# Altium PCB module_wifi.PcbDoc
Units mm, origin at the board's own origin, x right, y up, seen from the top; angles counter-clockwise.
Board outline 75.03 x 38 mm, 2 copper layers (Top Layer, Bottom Layer); 59 components, 41 nets, 252 pads, 57 vias.
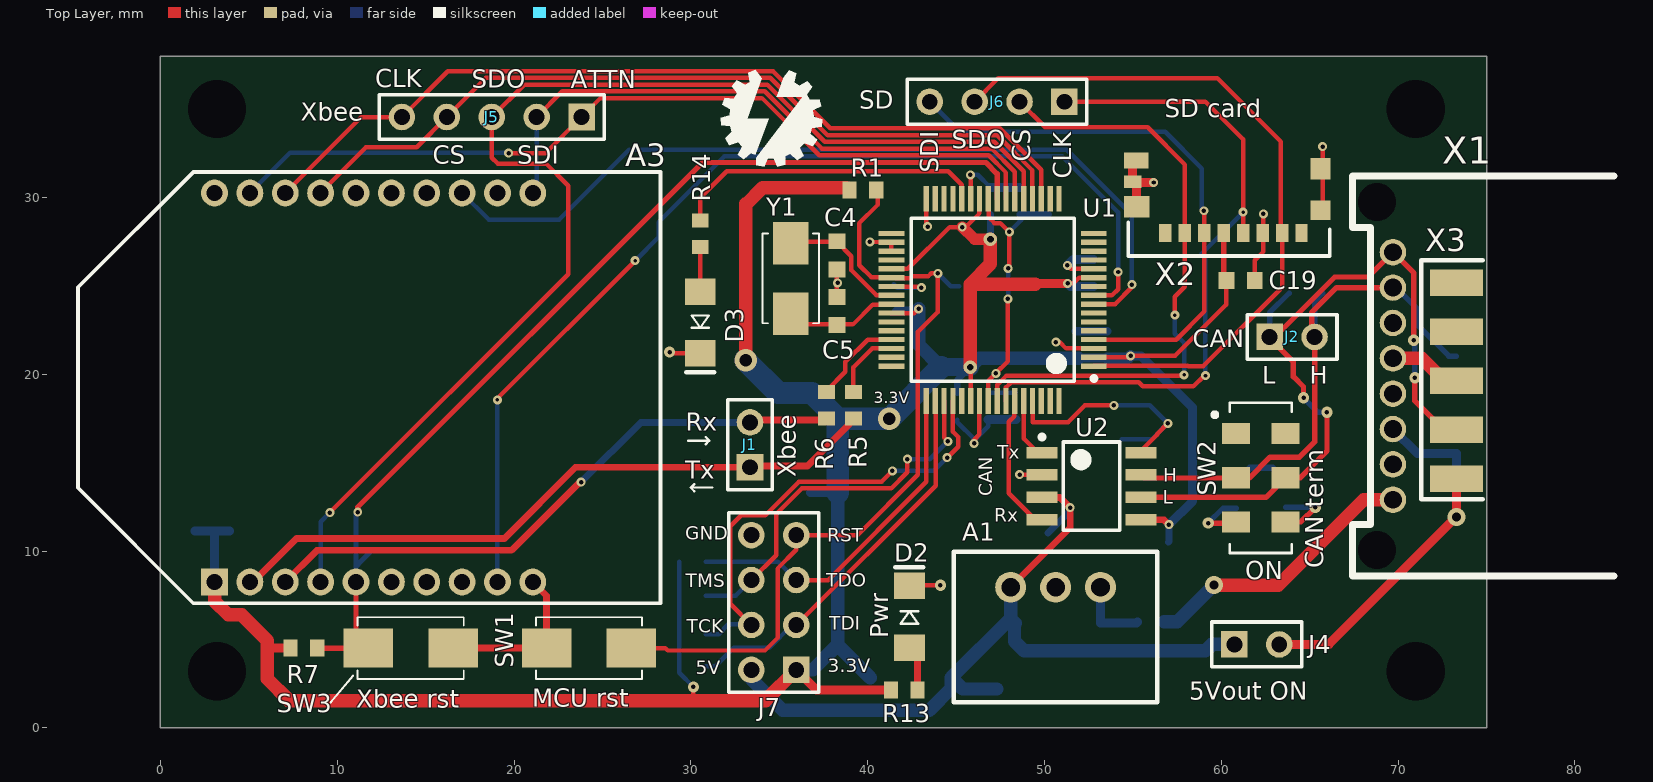
[diagram p0: Top Layer view]
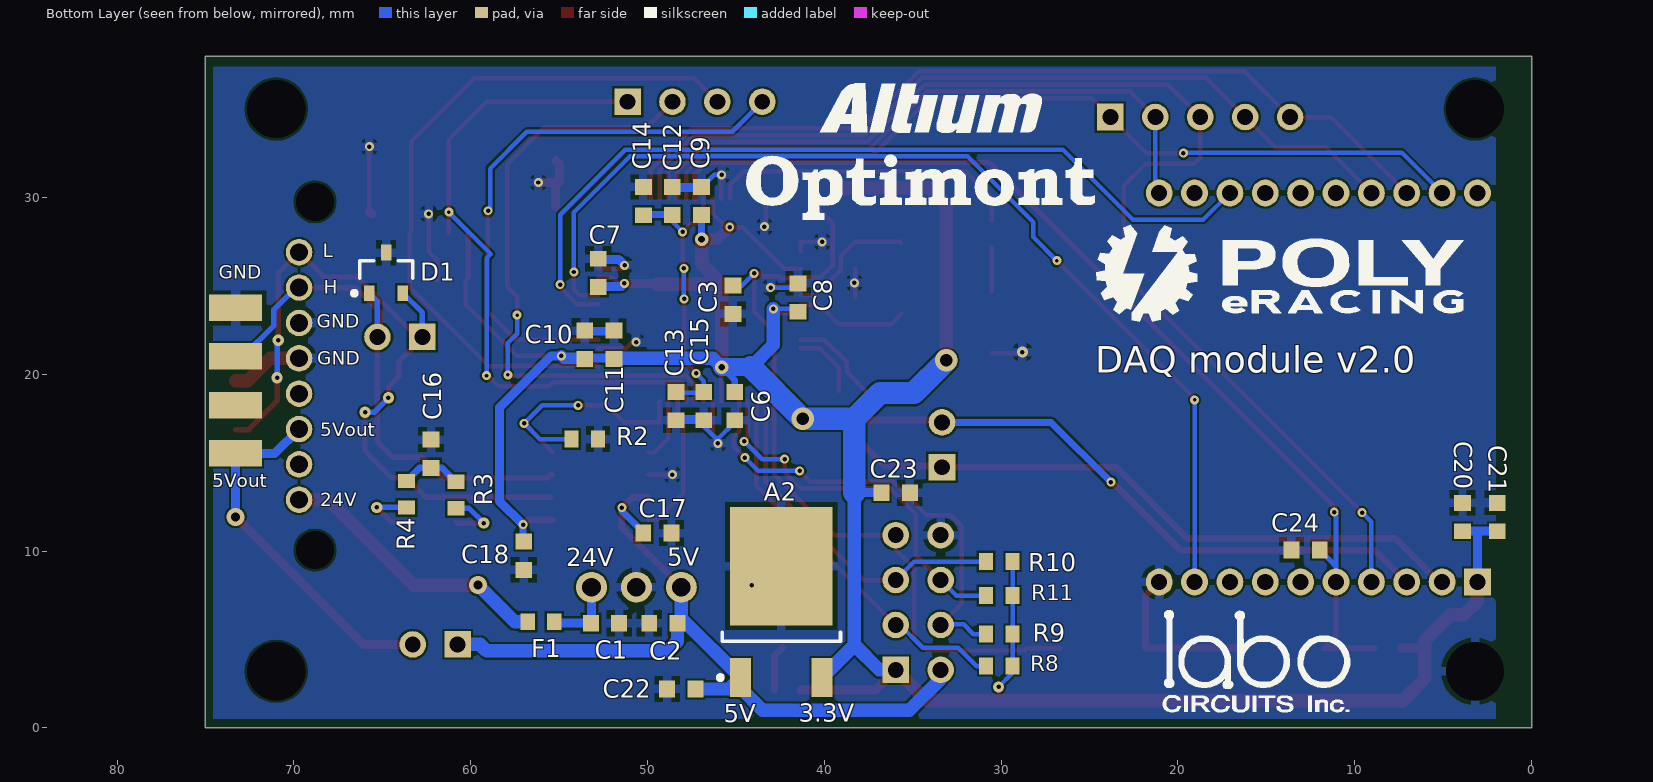
[diagram p1: Bottom Layer view, seen from below]
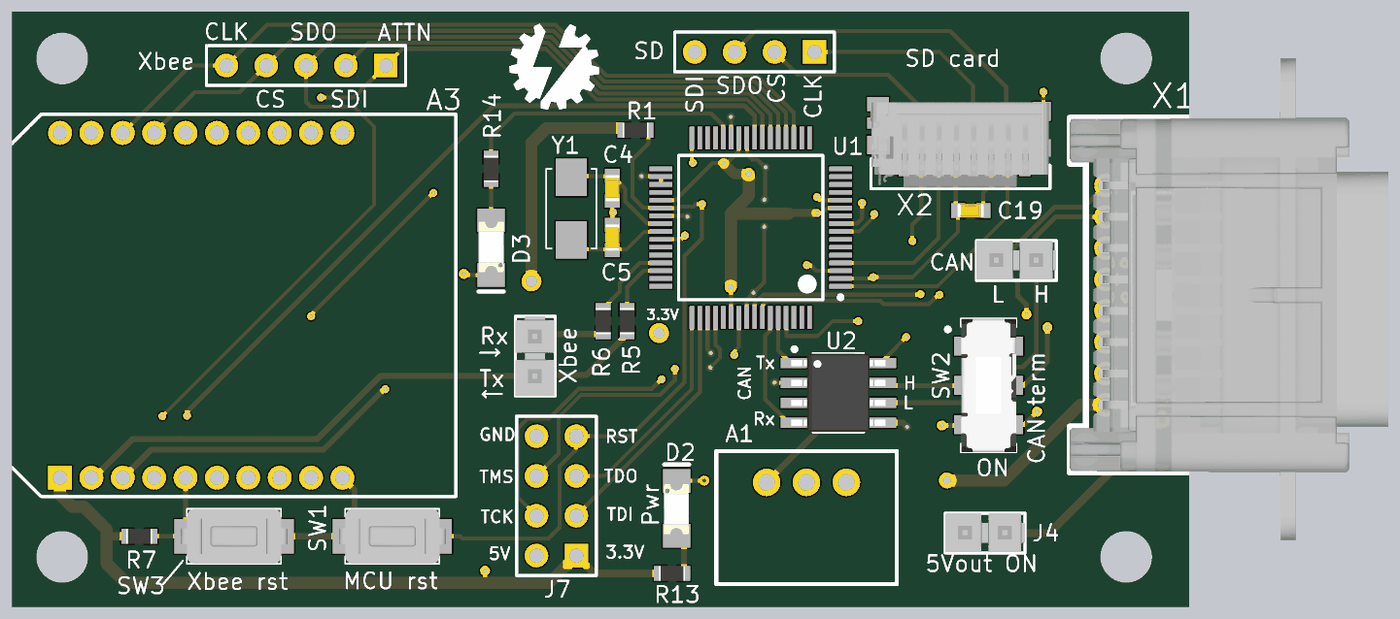
[diagram p2: 3D render of the assembled board from above, using the file's embedded part models]
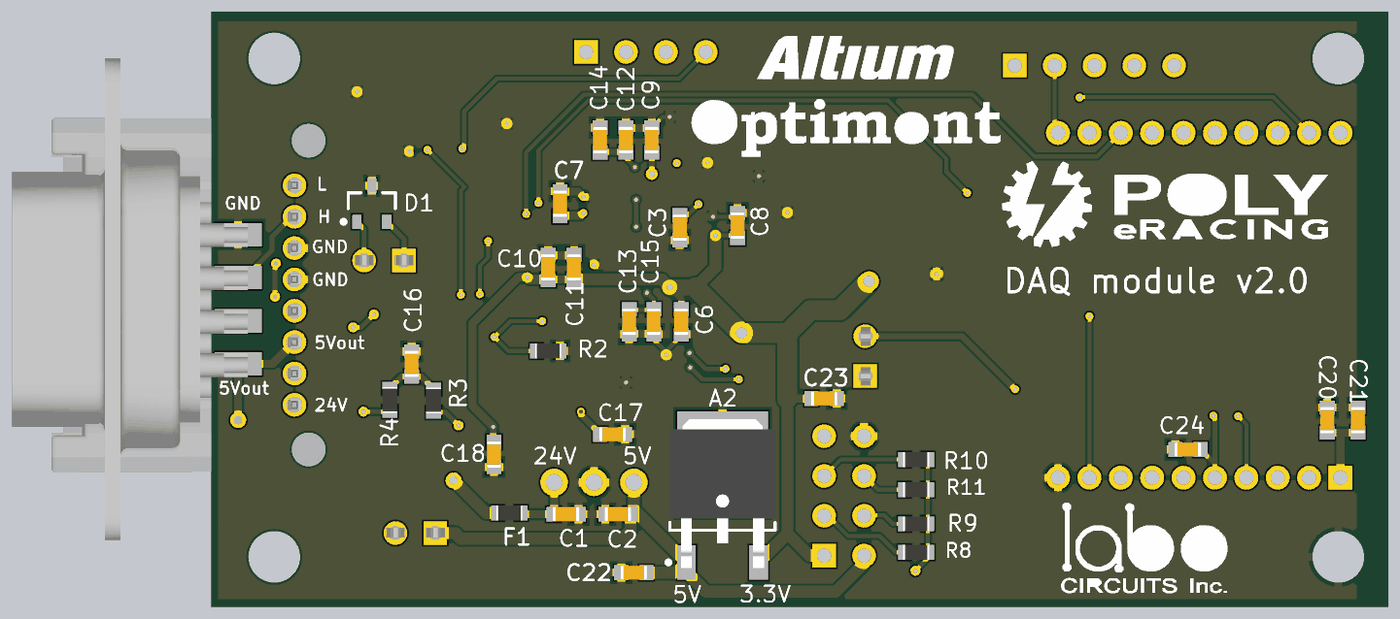
[diagram p3: 3D render of the assembled board from below, using the file's embedded part models]

## Layer stack, top to bottom
Top Solder: solder mask 0.0102, Solder Resist, Dk 3.5
Top Layer: signal copper 0.0356
Dielectric 1: dielectric 0.32, FR-4, Dk 4.8
Bottom Layer: signal copper 0.0356
Bottom Solder: solder mask 0.0102, Solder Resist, Dk 3.5

## Board outline
0,0 75.025,0 75.025,38 0,38

## Design rules (kind name [scope] priority, off if disabled: settings)
Clearance [All] p1: gap=0.127
HoleSize [All] p1: absolutevalues=TRUE maxlimit=5.08 minlimit=0.203 maxpercent=80.000 minpercent=20.000
MinimumSolderMaskSliver [All] p1: minsoldermaskwidth=0.127
NetAntennae [All] p1: netantennaetolerance=0.254
PlaneConnect [All] p1: planeconnectstyle=Relief reliefexpansion=0.508 reliefentries=4 reliefconductorwidth=0.254 reliefairgap=0.381
PolygonConnect PolygonConnect_GND [InNet('GND') vs InNet('GND')] p1: connectstyle=Relief reliefconductorwidth=0.508 reliefentries=4 polygonreliefangle="90 Angle" airgapwidth=0.254
PolygonConnect [All] p2: connectstyle=Relief reliefconductorwidth=0.254 reliefentries=4 polygonreliefangle="90 Angle" airgapwidth=0.254
RoutingVias [All] p1: holewidth=0.381 width=0.762 viastyle="Through Hole" minholewidth=0.203 minwidth=0.406 maxholewidth=3.048 maxwidth=2.54
SilkToSilkClearance [All] p1: silktosilkclearance=0
SilkToSolderMaskClearance [IsPad] p1: minsilkscreentomaskgap=0 clearancetoexposedcopper=TRUE
SolderMaskExpansion [All] p1: expansion=0.102
Width [All] p1: maxlimit=2.54 minlimit=0.203 preferedwidth=0.381
24 further rules are at their usual default settings.

## Components (designator, comment, footprint, x,y, rotation, side; value= is the part's Value field where it differs from the comment)
A1 "5V DCDC" R-78E-0.5 53.169,7.955 r180 top
A2 "3.3V LDO" TO252-3 42.437,5.996 r90 bottom
A3 "XBEE WI-FI S6B" Xbee_TH 3.061,8.252 r90 top
C1 "CAP CER 0603 1uF 25V X7R 20%" C0603 52.407,5.923 r0 bottom
C2 "CAP CER 0603 1uF 25V X7R 20%" C0603 49.105,5.923 r180 bottom
C3 "CAP CER 0603 0.1uF 50V C0G 10%" C0603 45.168,24.211 r90 bottom
C4 "CAP CER 0603 10pF 50V C0G 5%" C0603 38.261,26.724 r90 top
C5 "CAP CER 0603 10pF 50V C0G 5%" C0603 38.261,23.579 r270 top
C6 "CAP CER 0603 0.1uF 50V C0G 10%" C0603 45.069,18.2 r90 bottom
C7 "CAP CER 0603 0.1uF 50V C0G 10%" C0603 52.788,25.735 r270 bottom
C8 "CAP CER 0603 0.1uF 50V C0G 10%" C0603 41.485,24.338 r270 bottom
C9 "CAP CER 0603 0.1uF 50V C0G 10%" C0603 46.946,29.799 r270 bottom
C10 "CAP CER 0603 0.01uF 50V X7R 10%" C0603 53.55,21.671 r270 bottom
C11 "CAP CER 0603 1uF 25V X7R 20%" C0603 51.899,21.671 r270 bottom
C12 "CAP CER 0603 0.1uF 50V C0G 10%" C0603 48.597,29.799 r270 bottom
C13 "CAP CER 0603 0.1uF 50V C0G 10%" C0603 48.386,18.2 r90 bottom
C14 "CAP CER 0603 2.2uF 6.3V X7R 10%" C0603 50.235,29.793 r270 bottom
C15 "CAP CER 0603 1uF 25V X7R 20%" C0603 46.819,18.2 r90 bottom
C16 "CAP CER 0603 47nF 50V X7R 10%" C0603 62.244,15.51 r90 bottom
C17 "CAP CER 0603 2.2uF 6.3V X7R 10%" C0603 49.444,11.021 r0 bottom
C18 "CAP CER 0603 0.1uF 50V C0G 10%" C0603 57.001,9.734 r90 bottom
C19 "CAP CER 0603 0.1uF 50V C0G 10%" C0603 61.093,25.297 r180 top
C20 "CAP CER 0603 1uF 25V X7R 20%" C0603 3.907,11.924 r270 bottom
C21 "CAP CER 0603 8.2pF 50V COG ±0.5pF" C0603 1.944,11.924 r270 bottom
C22 "CAP CER 0603 10uF 6.3V X5R 20%" C0603 48.09,2.2 r180 bottom
C23 "CAP CER 0603 4.7uF 25V X7R 10%" C0603 35.96,13.301 r0 bottom
C24 "CAP CER 0603 0.1uF 50V C0G 10%" C0603 12.781,10.056 r180 bottom
D1 "PESD1CAN-UX" SOT23 64.786,25.734 r90 bottom
D2 "Green LED" LED1206 42.355,6.295 r270 top
D3 "Green" LED1206 30.532,22.927 r90 top
F1 "500 mA" R0603 56.024,6.002 r0 bottom
J1 "Header for debugging" HDR1X2 33.346,14.739 r90 top
J2 "Header for CAN" HDR1X2 62.737,22.109 r0 top
J4 "Header 2" HDR1X2 60.741,4.72 r0 top
J5 "Header, Xbee SPI" HDR1X5 23.819,34.551 r180 top
J6 "SD SPI" HDR1X4 51.13,35.416 r180 top
J7 "JTAG" JTAG_Header 35.962,3.281 r90 top
R1 "RES 0603 10k 5% 0.1W" R0603 39.732,30.431 r180 top
R2 "RES 0603 10k 5% 0.1W" R0603 53.55,16.337 r0 bottom
R3 "RES 0603 60R 1% 1/4W" R0603 60.841,13.172 r270 bottom
R4 "RES 0603 60R 1% 1/4W" R0603 63.631,13.22 r270 bottom
R5 "RES 0603 100R 5% 1/4W" R0603 39.199,18.242 r90 top
R6 "RES 0603 100R 5% 1/4W" R0603 37.675,18.242 r90 top
R7 "RES 0603 4.7k 5% 0.1W" R0603 8.116,4.513 r180 top
R8 "RES 0603 100k 5% 0.1W" R0603 30.099,3.493 r180 bottom
R9 "RES 0603 100k 5% 0.1W" R0603 30.099,5.305 r180 bottom
R10 "RES 0603 100k 5% 0.1W" R0603 30.099,9.409 r180 bottom
R11 "RES 0603 100k 5% 0.1W" R0603 30.099,7.486 r180 bottom
R13 "RES 0603 220R 5% 0.25W" R0603 42.067,2.148 r180 top
R14 "RES 0603 220R 5% 1/4W" R0603 30.529,27.957 r90 top
SW1 "147873-1" 147873 24.239,4.513 r0 top
SW2 "CL-SB-22A-01T" CL-SB-22A-01T 62.237,14.144 r0 top
SW3 "147873-1" 147873 14.15,4.513 r180 top
U1 "Microconroller" LQFP64 47.073,24.211 r180 top
U2 "CAN Transceiver" SOIC-8 52.661,13.67 r0 top
X1 "34793-0080" 34791-0080 69.711,19.903 r90 top
X2 "475710001" 475710001 64.541,27.989 r180 top
X3 "D-SUB Connector" "A-DS 09 LL/Z" 73.301,19.639 r270 top
Y1 "NX5043GA-16.00MHz" NX5032GA 35.645,25.42 r270 top

## Footprints (in the part's own frame and the unit in brackets; to place one, negate y for a bottom-side part, rotate by r counter-clockwise, add the part's x,y. Pads: shape width x height; smd on the part's side, far side on the other; paste and mask are expansions set on the pad)
34791-0080 [mm] "Molex Mini50, 8 position, single row"
  round 0 hole 2.15 unplated paste+0 mask+0: 0(-9.85,0.9) 0(9.85,0.9)
  round 1.5 hole 1: 1(-7,0) 2(-5,0) 3(-3,0) 4(-1,0) 5(1,0) 6(3,0) 7(5,0) 8(7,0)
  silkscreen extent -11.31,-12.5 11.31,2.3, body extent -11.31,-15.5 11.31,2.3, height 10.09
147873 [mm]
  rect 2.8x2.2 smd: 1(-2.4,0) 2(2.4,0)
  silkscreen extent -3,-1.75 3,1.75, body extent -3.4,-1.75 3.4,1.75, height 5.15
475710001 [mm] "9 (8 + 1) Position Card Connector Secure Digital - microSD™ Surface Mount, Right Angle Gold"
  rect 1.15x1.1 smd mask+0.05: 0(-1.075,-1.3)
  rect 1.15x1.2 smd mask+0.1: 0(-1.075,-3.64)
  rect 1.45x1.2 smd mask+0.1: 0(9.325,-1.49)
  rect 1.4x0.9 smd mask+0.1: 0(9.35,-4.1)
  rect 1x0.7 smd mask+0.1: 0(9.55,-2.89)
  rect 0.7x1 smd mask+0.1: 1(7.7,0) 2(6.6,0) 3(5.5,0) 4(4.4,0) 5(3.3,0) 6(2.2,0) 7(1.1,0) 8(0,0)
  silkscreen extent -1.6,-0.6 9.8,1.3, body extent -1.58,-15.3 9.82,1.25, height 2.31
"A-DS 09 LL/Z" [mm] "DSub, 9 pin, board edge"
  rect 1.5x3 smd: 1(5.54,0) 2(2.77,0) 3(0,0) 4(-2.77,0) 5(-5.54,0)
  rect 1.5x3 smd far side: 6(-4.115,0) 7(-1.385,0) 8(1.385,0) 9(4.115,0)
  silkscreen extent -6.8,-2 6.7,1.5, body extent -15.37,-0.62 15.37,14.39, height 5.77
C0603 [mm] "0603 Chip Capacitor, 2-Leads, Body 1,60x0,80mm, IPC Medium Density"
  rect 0.9x0.95 smd: 1(-0.8,0) 2(0.8,0)
  body extent -0.85,-0.45 0.85,0.45, height 0.9
CL-SB-22A-01T [mm] "CL-SB-22A-01T Slide Switch, Flat, 6-Leads, Pitch 2,50mm,  Body 8,50x3,50mm,  IPC Medium Density"
  rect 1.6x1.2 smd: 1(-1.4,2.5) 2(-1.4,0) 3(-1.4,-2.5) 4(1.4,2.5) 5(1.4,0) 6(1.4,-2.5)
  silkscreen extent -2.73,-4.25 1.75,4.25, body extent -1.75,-4.25 1.75,4.25, height 5.5
HDR1X2 [mm] "Connector; Header; 2 Position"
  rect 1.5x1.5 hole 0.9: 1(0,0)
  round 1.5 hole 0.9: 2(2.54,0)
  silkscreen extent -1.27,-1.27 3.81,1.27, body extent -1.27,-1.22 3.81,1.27, height 8.44
HDR1X4 [mm] "Connector; Header; 4 Position"
  rect 1.5x1.5 hole 0.9: 1(0,0)
  round 1.5 hole 0.9: 2(2.54,0) 3(5.08,0) 4(7.62,0)
  silkscreen extent -1.27,-1.27 8.89,1.27
HDR1X5 [mm] "Connector; Header; 5 Position"
  rect 1.5x1.5 hole 0.9: 1(0,0)
  round 1.5 hole 0.9: 2(2.54,0) 3(5.08,0) 4(7.62,0) 5(10.16,0)
  silkscreen extent -1.27,-1.27 11.43,1.27
JTAG_Header [mm] "Programming header"
  rect 1.5x1.5 hole 0.9: 1(0,0)
  round 1.5 hole 0.9: 2(0,2.54) 3(2.54,0) 4(2.54,2.54) 5(5.08,0) 6(5.08,2.54) 7(7.62,0) 8(7.62,2.54)
  silkscreen extent -1.27,-1.27 8.89,3.81
LED1206 [mm] "LED 1206"
  rect 1.5x1.75 smd: 1(1.75,0) 2(-1.75,0)
  silkscreen extent -2.8,-0.8 0.4,0.8, body extent -1.55,-0.81 1.65,0.79, height 1.1
LQFP64 [mm] "TSQFP, 64-Leads, Body 10,00x10,00mm, Pitch 0,50mm, IPC Medium Density"
  rect 1.45x0.3 smd: 1(-5.725,3.75) 2(-5.725,3.25) 3(-5.725,2.75) 4(-5.725,2.25) 5(-5.725,1.75) 6(-5.725,1.25) 7(-5.725,0.75) 8(-5.725,0.25) 9(-5.725,-0.25) 10(-5.725,-0.75) 11(-5.725,-1.25) 12(-5.725,-1.75) 13(-5.725,-2.25) 14(-5.725,-2.75) 15(-5.725,-3.25) 16(-5.725,-3.75) 33(5.725,-3.75) 34(5.725,-3.25) 35(5.725,-2.75) 36(5.725,-2.25) 37(5.725,-1.75) 38(5.725,-1.25) 39(5.725,-0.75) 40(5.725,-0.25) 41(5.725,0.25) 42(5.725,0.75) 43(5.725,1.25) 44(5.725,1.75) 45(5.725,2.25) 46(5.725,2.75) 47(5.725,3.25) 48(5.725,3.75)
  rect 0.3x1.45 smd: 17(-3.75,-5.725) 18(-3.25,-5.725) 19(-2.75,-5.725) 20(-2.25,-5.725) 21(-1.75,-5.725) 22(-1.25,-5.725) 23(-0.75,-5.725) 24(-0.25,-5.725) 25(0.25,-5.725) 26(0.75,-5.725) 27(1.25,-5.725) 28(1.75,-5.725) 29(2.25,-5.725) 30(2.75,-5.725) 31(3.25,-5.725) 32(3.75,-5.725) 49(3.75,5.725) 50(3.25,5.725) 51(2.75,5.725) 52(2.25,5.725) 53(1.75,5.725) 54(1.25,5.725) 55(0.75,5.725) 56(0.25,5.725) 57(-0.25,5.725) 58(-0.75,5.725) 59(-1.25,5.725) 60(-1.75,5.725) 61(-2.25,5.725) 62(-2.75,5.725) 63(-3.25,5.725) 64(-3.75,5.725)
  silkscreen extent -5.85,-4.6 4.6,4.6, body extent -5,-5 5,5, height 1.45
NX5032GA [mm]
  rect 2.4x2 smd: 1(-2,0) 2(2,0)
  silkscreen extent -2.54,-1.6 2.54,1.6, body extent -2.54,-1.6 2.54,1.6, height 1.3
R0603 [mm] "R0603 Chip Resistor, 2-Leads, Body 1,57x0,85mm, IPC Medium Density"
  rect 0.8x0.95 smd: 1(-0.75,0) 2(0.75,0)
  body extent -0.82,-0.48 0.82,0.48, height 0.5
R-78E-0.5 [mm] "Through hole DCDC"
  round 1.75 hole 1.05: 1(0,0) 2(2.54,0) 3(5.08,0)
  silkscreen extent -3.21,-2 8.29,6.5, body extent -3.2,-2 8.3,6.5, height 10.4
SOIC-8 [mm] "SOIC, 8-Leads, Body 4.90x3.90mm, Pitch 1.27mm, IPC Medium Density"
  rect 1.75x0.65 smd: 1(-2.8,1.905) 2(-2.8,0.635) 3(-2.8,-0.635) 4(-2.8,-1.905) 5(2.8,-1.905) 6(2.8,-0.635) 7(2.8,0.635) 8(2.8,1.905)
  silkscreen extent -2.92,-2.5 1.6,2.9, body extent -3,-2.5 3,2.5, height 1.75
SOT23 [mm] "SOT23, 3-Leads, Body 2.90x2.30mm, Pitch 0.95mm, IPC Medium Density"
  rect 0.9x0.6 smd: 1(-1.15,0.95) 2(-1.15,-0.95) 3(1.15,0)
  silkscreen extent -1.27,-1.5 0.7,1.93, body extent -0.7,-1.5 0.7,1.5, height 1.1
TO252-3 [mm] "TO252-3, 3-Pads, Body 5,95x6,71mm (max), IPC Medium Density"
  rect 2.2x1.2 smd: 1(-3.15,2.3) 3(-3.15,-2.3)
  rect 6.7x5.8 smd: 2(3.15,0)
  silkscreen extent -3.27,-3.35 -0.6,3.58, body extent -3.5,-3.35 6,3.35, height 2.5
Xbee_TH [mm] "Xbee module, through whole"
  rect 1.52x1.52 / inner rect 2.5x1.2 / far side rect 1.52x1.52 hole 0.91: 1(0,0)
  round 1.52 / inner oval 2.5x1.2 / far side round 1.52 hole 0.91: 2(0,-2) 3(0,-4) 4(0,-6) 5(0,-8) 6(0,-10) 7(0,-12) 8(0,-14) 9(0,-16) 10(0,-18) 11(22,-18) 12(22,-16) 13(22,-14) 14(22,-12) 15(22,-10) 16(22,-8) 17(22,-6) 18(22,-4) 19(22,-2) 20(22,0)
  silkscreen extent -1.19,-25.22 23.19,7.72, body extent -1.08,-25.61 23.3,20.61, height 8.25

## Part data
A1: library part R78E5.0-0.5
A2: library part NCV5501DT33RKG, "Linear Voltage Regulator IC Positive Fixed 1 Output 3.3V 500mA DPAK-3"
A3: "Module Wifi"
C1 C2 C11 C15 C20: "1uF ceramic capacitor"
C3 C6 C7 C8 C9 C12 C13 C18 C19 C24: "0.1uF ceramic capacitor"
C4 C5: "10pF ceramic capacitor"
C10: "0.01uF ceramic capacitor"
C14 C17: "2.2uF ceramic capacitor"
C16: "47nF ceramic capacitor"
C21: "8.2pF 50V Ceramic Capacitor C0G, NP0 0603"
C22: "10uF ceramic capacitor"
C23: "4.7uF ceramic capacitor"
D1: "TVS diodes for CAN bus"
D2 D3: library part LTST-C150KGKT, "Green LED 1206"
F1: library part C2Q500, "Fuse, 500 mA, 63VDC, 0603, fast"
J1 J2: library part "Header 2", "Header, 2-Pin"
J4: "Header, 2-Pin"
J5: library part "Header 5", "Header, 5-Pin"
J6: library part "Header 4", "Header, 4-Pin"
J7: library part JTAG_Header, "JTAG header, MCU programming"
R1 R2: "10 kOhms resistor"
R3 R4: "60 Ohms resistor, 1/4W"
R5 R6: "100 Ohms resistor, 1/4W"
R7: "4.7 kOhms resistor"
R8 R9 R10 R11: "100 kOhm resistor"
R13: "220 Ohms 0.25W Resistor"
R14: "220 Ohms resistor, 1/4W"
SW1 SW3: "Pushbutton switch SPST, 2 pins"
SW2: "SWITCH SLIDE DPDT 200MA 12VDC"
U1: library part TM4C123GN6PM, "32 bit Microcontroller"
U2: library part HVDA551-Q1, "Automotive 5-V CAN Transceiver with I/O Level Adapting and Low-Power Mode Supply Optimization"
X1: "Molex Mini50, 8 position, single row, right angle"
X2: "9 (8 + 1) Position Card Connector Secure Digital - microSD™ Surface Mount, Right Angle Gold"
X3: library part "A-DS 09 LL/Z", "CONN D-SUB PLUG 9POS R/A SOLDER"
Y1: "Crystal Oscillator 16 MHz"

## Free pads (board coordinates)
  round 0 hole 3.3 unplated paste+0 mask+0: 0(3.2,3.2) 0(3.2,35) 0(71,3.2) 0(71,35)

## Via types
v1: diameter 0.508, hole 0.254, Top Layer to Bottom Layer, 29 vias
v2: diameter 0.635, hole 0.254, Top Layer to Bottom Layer, 9 vias
v3: diameter 0.508, hole 0.203, Top Layer to Bottom Layer, 6 vias
v4: diameter 0.508, hole 0.254, Top Layer to Bottom Layer, tented both sides, 6 vias
v5: diameter 1.016, hole 0.508, Top Layer to Bottom Layer, 2 vias
v6: diameter 1.27, hole 0.711, Top Layer to Bottom Layer, 2 vias
v7: diameter 0.762, hole 0.381, Top Layer to Bottom Layer, 2 vias
v8: diameter 0.508, hole 0.254, Top Layer to Bottom Layer, tented top, 1 vias

## Nets (pads, with @x,y where several pads share a name; then routed paths per layer and width w, separated by ;. In a path a pad name is that pad's centre, name@x,y a point inside that pad or via, vN(x,y) a via of type N, cw(c..) or ccw(c..) an arc to the next point about the centre after c; other vN are vias at no path point)
3.3V: A2.3 A3.1 C6.2 C7.2 C8.2 C9.2 C10.2 C11.2 C18.2 C19.2 C20.2 C21.2 C23.2 J7.1 R1.2 R7.2 R8.2 R9.2 R10.2 R11.2 R13.2 U1.2 U1.11 U1.26 U1.37 U1.42 U1.54 U2.5 X2.4 | length 183.5
  Top Layer w0.254: 30.128,1.547 30.145,1.564 v2(30.145,2.315) ; U1.42 42.64,23.461 v1(42.883,23.704) ; U1.37 42.27,25.961 44.635,28.326 v1(45.35,28.326) ; v1@45.498,28.326 45.554,28.326 46.323,29.094 U1.26 ; v7(45.803,20.401) 45.823,20.381 U1.54 ; v1(51.308,25.139) 51.633,25.139 51.956,25.461 U1.11 ; U1.2 54.793,20.961 v1(54.873,21.042) 57.384,21.042 60.285,23.942 60.285,25.289 C19.2
  Top Layer w0.305: X2.4 60.141,25.448 C19.2
  Top Layer w0.381: U2.5@55.361,11.765 U2.5 56.769,11.765 v4(57.043,11.491)
  Top Layer w0.508: 6.041,4.543 6.071,4.513 R7.2 ; J7.1 37.095,2.148 R13.2 ; 49.486,25.1 49.524,25.139 ; 49.486,25.139 v1(51.308,25.139)
  Top Layer w0.635: v1(45.35,28.326) 46.036,27.64 v7(46.946,27.64)
  Top Layer w0.762: A3.1@3.276,8.037 A3.1 3.061,7.171 3.835,6.397 4.586,6.397 6.041,4.942 6.041,4.543 6.041,2.773 7.268,1.547 30.128,1.547 34.227,1.547 J7.1 ; v6(33.103,20.782) 33.103,29.643 ; 33.102,29.592 34.071,30.561 38.776,30.561 R1.2@38.907,30.431 ; v7(45.803,20.401) 45.803,25.1 ; v7(46.946,27.64) 46.946,26.243 45.803,25.1 ; 49.486,25.1 45.803,25.1
  Bottom Layer w0.254: R10.2 R11.2 R9.2 R8.2 29.349,3.111 v2(30.145,2.315) ; C8.2@41.485,23.576 41.613,23.704 v1(42.883,23.704) ; v7@46.946,27.894 v7(46.946,27.64) v7@47.2,27.64
  Bottom Layer w0.381: C6.2@45.069,18.962 45.069,19.668 v7(45.803,20.401) ; v7@46.946,27.894 C9.2@46.946,29.037 ; C18.2@57.001,10.496 57.043,10.538 v4(57.043,11.491)
  Bottom Layer w0.508: C21.2 2.925,11.124 ; A3.1 3.061,10.988 2.925,11.124 ; C20.2 2.925,11.124 ; C23.2 38.298,13.301 38.31,13.29 ; v1(51.308,25.139) 51.473,24.973 C7.2@52.788,24.973 ; C11.2@51.899,20.909 C10.2@53.55,20.909 ; v1(54.873,21.042) 55.448,21.042 58.376,18.114 58.376,12.823 v4(57.043,11.491)
  Bottom Layer w0.635: C10.2@53.55,20.909 54.741,20.909 v1(54.873,21.042)
  Bottom Layer w0.762: J7.1 36.894,3.281 38.298,4.685 ; 38.298,13.301 38.298,4.685 ; A2.3 38.298,4.685 ; v1(42.883,23.704) 42.883,21.671 44.152,20.401 ; v7(45.803,20.401) 46.311,20.909 C11.2@51.899,20.909
  Bottom Layer w1.016: 44.152,20.401 v7(45.803,20.401)
  Bottom Layer w1.27: v6(33.103,20.782) 34.943,18.942 36.848,18.942 38.31,17.48 ; 38.31,13.29 38.31,17.48 ; 44.152,20.401 v6(41.231,17.48) 38.31,17.48
5V: A1.3 A2.1 C2.2 C17.2 C22.2 J4.1 J7.2 U2.3 | length 46.5
  Top Layer w0.381: A1.3 51.454,11.321 v8(51.454,12.464) 50.883,13.035 U2.3@49.961,13.035
  Bottom Layer w0.381: C17.2@50.206,11.021 51.454,12.268 v8(51.454,12.464)
  Bottom Layer w0.762: J7.2 33.422,2.769 35.2,0.991 43.494,0.991 44.737,2.234 A2.1 ; C22.2 45.383,2.2 A2.1 ; A1.3 48.089,6.197 A2.1 ; C2.2 48.305,4.897 48.851,4.351 59.103,4.351 59.472,4.72 J4.1 ; C2.2@48.324,5.942 C2.2@48.343,5.923
24V: F1.2 X1.1 | length 15.8
  Top Layer w0.762: v5(59.577,8.076) 63.226,8.076 68.053,12.903 X1.1
  Bottom Layer w0.762: F1.2 57.502,6.002 v5(59.577,8.076)
CAN_H: D1.1 J2.2 SW2.2 U2.7 X1.7 X3.7 | length 32.2
  Top Layer w0.254: U2.7@55.361,14.305 55.428,14.373 U2.7@55.496,14.305
  Top Layer w0.305: U2.7 55.496,14.305 55.668,14.134 60.827,14.134 SW2.2 61.587,14.144 62.759,15.317 64.426,15.317 65.277,16.167 J2.2 65.112,22.274 65.112,23.495 66.52,24.903 X1.7
  Bottom Layer w0.305: J2.2 65.277,24.125 D1.1 ; X1.7@69.42,24.754 X1.7@69.711,24.754 ; X1.7 69.889,24.903 71.136,23.656 71.136,22.764 72.876,21.024 X3.7
CAN_L: D1.2 J2.1 SW2.5 U2.6 X1.8 X3.2 | length 43.4
  Top Layer w0.305: U2.6 62.528,13.035 SW2.5 64.461,14.144 65.978,15.662 v2(65.978,17.847) ; J2.1 63.024,22.109 66.419,25.504 68.312,25.504 X1.8 70.889,25.725 v2(70.889,21.919) ; J2.1@63.066,22.109 63.066,21.708 64.081,20.693 64.081,19.866 64.653,19.294 v2(64.653,18.669) ; v2(70.95,19.802) 70.95,18.485 72.566,16.869 X3.2
  Bottom Layer w0.305: J2.1 62.737,23.485 D1.2 ; v2(64.653,18.669) 65.475,17.847 v2(65.978,17.847) ; v2(70.889,21.919) 70.95,21.859 v2(70.95,19.802)
CAN_RX: U1.59 U2.4 | length 8
  Top Layer w0.254: U1.59 48.303,18.467 48.303,17.625 47.984,17.306 47.984,13.267 49.486,11.765 U2.4@49.961,11.765
CAN_TX: U1.60 U2.1 | length 3.6
  Top Layer w0.254: U1.60 48.823,16.365 49.613,15.575 U2.1@49.961,15.575
"CS SD": J6.2 U1.57 X2.2 | length 35
  Top Layer w0.254: U1.57 47.323,19.4 47.85,19.928 57.935,19.928 v3(57.901,19.962) ; J6.2 50.043,33.963 55.84,33.963 57.941,31.862 X2.2 57.941,24.95 57.376,24.385 v3(57.376,23.349)
  Bottom Layer w0.254: v3(57.376,23.349) 57.376,22.292 57.901,21.767 v3(57.901,19.962)
GND: A1.2 A2.2 A3.10 C1.1 C2.1 C3.1 C4.1 C5.1 C6.1 C7.1 C8.1 C9.1 C10.1 C11.1 C12.1 C13.1 C14.1 C15.1 C16.2 C17.1 C18.1 C19.1 C20.1 C21.1 C22.1 C23.1 C24.1 D1.3 D2.2 D3.2 J7.8 pad.0@3.2,3.2 R2.1 SW1.1 SW3.1 U1.3 U1.12 U1.27 U1.32 U1.34 U1.35 U1.39 U1.55 U2.2 X1.5 X1.6 X2.0 X2.6 X3.3 X3.6 | length 57.9
  Top Layer w0.254: v2(28.797,21.256) 28.876,21.177 D3.2 ; C5.1@38.261,24.341 38.261,25.13 v1(38.302,25.171) 38.261,25.211 C4.1@38.261,25.962 ; v1(40.123,27.491) 40.132,27.481 41.328,27.481 U1.34 U1.35 ; U1.39 42.985,24.961 v1(43.041,24.906) ; D2.2 42.379,8.068 v2(44.114,8.068) ; U1.32 43.323,28.414 v1(43.39,28.347) ; v1(45.809,31.278) 45.823,31.265 U1.27 ; v1(46.023,16.094) 46.023,16.303 46.323,16.603 U1.55 ; v4(48.59,14.327) 48.612,14.305 U2.2@49.961,14.305 ; v1(50.647,21.821) 50.86,21.821 51.22,21.461 U1.3 ; v1(51.297,26.158) 51.493,25.961 U1.12 ; C19.1 61.893,26.448 62.386,26.942 62.386,27.944 X2.6 62.379,28.027 v1(62.379,29.077) ; X2.0@65.728,29.201 v1(65.728,32.878)
  Top Layer w0.381: SW3.1 SW1.1 21.839,7.474 A3.10
  Top Layer w0.508: X2.0@55.191,32.089 54.991,31.889 X2.0@54.991,30.879 ; X2.0@55.216,29.479 55.216,30.654 X2.0@54.991,30.879 ; v1(56.18,30.846) 55.204,30.846 55.081,30.969 X2.0@54.991,30.879 ; X2.0@65.591,29.064 X2.0@65.728,29.201
  Top Layer w0.762: X1.5 71.339,20.903 72.603,19.639 X3.3
  Bottom Layer w0.254: C8.1@41.485,25.1 41.679,24.906 v1(43.041,24.906) ; C6.1@45.069,17.438 45.069,17.289 46.023,16.335 v1(46.023,16.094) 46.023,16.26 46.819,17.056 C15.1@46.819,17.438 ; v1(45.809,31.278) 46.229,31.278 C9.1@46.946,30.561
  Bottom Layer w0.508: C15.1@46.819,17.438 C13.1@48.386,17.438 ; C9.1@46.946,30.561 C12.1@48.597,30.561 ; v1(51.297,26.158) 51.636,26.497 C7.1@52.788,26.497 ; C11.1@51.772,22.433 C10.1@53.55,22.433
"MISO SD": J6.3 U1.1 X2.7 | length 40.1
  Top Layer w0.254: J6.3 47.375,36.74 59.782,36.74 63.362,33.161 63.362,28.068 X2.7 63.441,24.931 58.972,20.461 58.12,20.461 58.111,20.47 52.806,20.47 U1.1
"MOSI SD": J6.4 U1.4 X2.3 | length 32
  Top Layer w0.254: U1.4 57.448,21.961 59.041,23.554 X2.3 59.041,29.225 v1(59.017,29.249)
  Bottom Layer w0.254: J6.4 45.209,33.717 56.824,33.717 58.904,31.637 58.904,29.362 v1(59.017,29.249)
NetA1_1: A1.1 C1.2 F1.1 | length 4.1
  Bottom Layer w0.508: C1.2@53.169,5.923 A1.1 ; C1.2 55.196,5.923 F1.1
NetC4_2: C4.2 U1.40 Y1.1 | length 7.4
  Top Layer w0.254: Y1.1 35.712,27.486 38.261,27.486 39.073,26.674 39.073,25.894 40.486,24.481 41.328,24.481 U1.40
NetC5_2: C5.2 U1.41 Y1.2 | length 6.4
  Top Layer w0.254: Y1.2 36.248,22.817 38.261,22.817 39.168,22.817 40.293,23.942 41.328,23.942 U1.41
NetC12_2: C12.2 C13.2 C14.2 C15.2 U1.25 U1.56 | length 18.5
  Top Layer w0.254: U1.25 46.842,29.917 46.842,28.881 47.172,28.552 47.5,28.552 v4@48.007,28.045 ; U1.56@46.842,18.506 U1.56 46.823,19.619 v4(47.254,20.05) 47.936,20.732 v4(47.936,24.259) ; v4(47.946,25.989) 48,26.044 48,28.037 v4@48.007,28.045 ; v4(48.022,28.059) v4@48.007,28.045
  Bottom Layer w0.254: v4(47.254,20.05) 46.819,19.615 C15.2 46.819,18.962 C13.2@48.386,18.962 ; v4(47.936,24.259) 47.936,24.269 47.946,24.279 v4(47.946,25.989) ; v4(48.022,28.059) 48.676,28.714 48.597,28.714 C12.2@48.597,29.037
  Bottom Layer w0.381: C12.2@48.597,29.037 50.228,29.037 C14.2@50.235,29.031
NetC16_1: C16.1 R3.1 R4.1 | length 3.4
  Bottom Layer w0.381: R3.1 61.63,14.71 C16.1 62.891,14.71 R4.1
NetD2_1: D2.1 R13.1 | length 2.6
  Top Layer w0.381: D2.1 42.817,4.083 R13.1
NetD3_1: D3.1 R14.1 | length 2.5
  Top Layer w0.254: R14.1 30.529,24.681 D3.1
NetJ4_2: J4.2 X1.3 X3.1 X3.9 | length 22.9
  Top Layer w0.508: J4.2 66.092,4.72 v5(73.301,11.929) X3.1
  Bottom Layer w0.508: X1.3 71.09,15.524 X3.9 v5(73.301,11.929)
NetR3_2: R3.2 SW2.3 | length 3.5
  Top Layer w0.305: v2(59.259,11.582) 60.775,11.582 SW2.3
  Bottom Layer w0.305: v2(59.259,11.582) 60.098,12.422 R3.2
NetR4_2: R4.2 SW2.6 | length 3.7
  Top Layer w0.305: SW2.6 64.494,11.644 v2(65.32,12.47)
  Bottom Layer w0.305: R4.2 v2(65.32,12.47)
NetR5_2: R5.2 U1.46 | length 3.9
  Top Layer w0.254: R5.2@39.199,19.067 39.199,20.401 40.259,21.461 U1.46 U1.46@41.348,21.442
NetR6_2: R6.2 U1.45 | length 5.2
  Top Layer w0.254: R6.2@37.675,19.067 38.741,20.134 38.741,20.706 39.997,21.961 U1.45 U1.45@41.328,21.942
NetR14_2: R14.2 U1.28 | length 17.8
  Top Layer w0.254: R14.2 30.529,29.982 32.032,31.486 44.561,31.486 45.323,30.724 U1.28
RST: C3.2 J7.7 R1.1 SW1.2 U1.38 | length 46.2
  Top Layer w0.254: SW1.2 28.551,4.513 28.687,4.377 34.194,4.377 34.903,5.085 34.903,9.011 35.962,10.07 J7.7 39.421,10.901 42.843,14.323 42.843,22.394 43.969,23.521 v1(43.969,25.706) 43.589,25.706 43.44,25.558 42.513,25.558 42.397,25.442 41.612,25.442 41.572,25.481 40.215,25.481 39.53,26.166 39.53,28.551 40.557,29.578 R1.1@40.557,30.606
  Bottom Layer w0.254: v1(43.969,25.706) 44.701,24.973 C3.2@45.168,24.973
"SCKL SD": J6.1 U1.58 X2.5 | length 39.1
  Top Layer w0.254: U1.58 47.823,19.253 48.117,19.547 55.33,19.547 55.56,19.317 58.425,19.317 59.031,19.923 v3(59.107,19.923) ; J6.1 59.105,35.416 61.241,33.279 v3(61.241,29.168) X2.5
  Bottom Layer w0.254: v3(59.107,19.923) 59.107,26.564 58.872,26.799 v3(61.241,29.168)
STB_MODE: R2.2 U1.61 U2.8 | length 14.9
  Top Layer w0.254: U1.61 49.342,18.467 49.342,17.3 51.35,17.3 52.292,18.242 v1(53.931,18.242) ; U2.8@55.361,15.575 56.377,16.591 56.377,16.624 v1(56.979,17.226)
  Bottom Layer w0.254: v1(53.931,18.242) 55.963,18.242 v1(56.979,17.226) 56.09,16.337 R2.2@54.375,16.337
TCK: J7.4 R9.1 U1.52 | length 26.4
  Top Layer w0.254: J7.4 32.224,7.02 32.224,11.409 32.844,12.029 34.218,12.029 36.114,13.924 40.788,13.924 v1(41.397,14.533) ; v1(44.501,15.28) 45.117,15.895 45.117,16.452 44.823,16.747 U1.52
  Bottom Layer w0.254: R9.1 31.569,5.305 32.121,5.857 33.386,5.857 J7.4 ; v1(41.397,14.533) 43.745,14.533 44.491,15.28 v1(44.501,15.28)
TDI: J7.3 R8.1 U1.50 | length 22
  Top Layer w0.254: J7.3 43.843,13.702 43.843,18.467 U1.50
  Bottom Layer w0.254: R8.1 31.387,3.493 32.434,4.541 34.44,4.541 35.72,5.821 J7.3
TDO: J7.5 R10.1 U1.49 | length 19.8
  Top Layer w0.254: J7.5 37.768,8.361 43.323,13.916 U1.49
  Bottom Layer w0.254: R10.1 34.914,9.409 J7.5
TMS: J7.6 R11.1 U1.51 | length 21.5
  Top Layer w0.254: J7.6 34.828,9.768 34.828,12.1 36.272,13.543 41.331,13.543 42.247,14.459 v1(42.247,15.194) ; U1.51 44.323,16.42 v1(44.533,16.21)
  Bottom Layer w0.254: R11.1 32.547,7.486 J7.6 ; v1(42.247,15.194) 43.517,15.194 v1(44.533,16.21)
WIFI_ON_SLEEP: A3.13 U1.8 | length 48.3
  Top Layer w0.254: U1.8 53.993,23.961 54.944,24.913 v1(54.944,25.077)
  Bottom Layer w0.254: A3.13 18.563,28.75 22.556,28.75 26.507,32.701 51.259,32.701 54.944,29.015 v1(54.944,25.077)
WIFI_RESET: A3.5 C24.2 R7.1 SW3.2 U1.24 | length 58.4
  Top Layer w0.305: R7.1 SW3.2 11.061,5.202 A3.5 A3.5@10.968,8.345 ; v1(11.16,12.206) 11.16,12.48 30.658,31.978 46.681,31.978 47.323,31.336 U1.24
  Bottom Layer w0.305: A3.5 11.061,12.106 v1(11.16,12.206) ; 11.16,9.236 C24.2
WIFI_SLEEP_RQ: A3.9 U1.9 | length 58.8
  Top Layer w0.254: v3(19.061,18.55) 19.061,18.636 v3(26.85,26.425) ; U1.9 53.819,24.461 54.167,24.809 v1(54.167,25.785)
  Bottom Layer w0.254: A3.9 v3(19.061,18.55) ; v3(26.85,26.425) 28.172,27.747 28.172,28.6 31.892,32.32 50.998,32.32 54.167,29.15 v1(54.167,25.785)
WIFI_SPI_CLK: A3.18 J5.5 U1.19 | length 49.6
  Top Layer w0.254: A3.18 11.36,34.551 J5.5 16.254,37.146 34.651,37.146 37.888,33.908 47.48,33.908 49.823,31.566 U1.19
WIFI_SPI_MISO: A3.4 J5.3 U1.21 | length 69.9
  Top Layer w0.254: v1(9.585,12.18) 23.066,25.661 23.066,30.658 21.806,31.918 19.076,31.918 18.739,32.255 J5.3 20.572,36.384 34.335,36.384 37.573,33.146 47.165,33.146 48.823,31.488 U1.21
  Bottom Layer w0.254: A3.4 9.061,11.656 v1(9.585,12.18)
WIFI_SPI_MOSI: A3.11 J5.2 U1.22 | length 35.4
  Top Layer w0.254: J5.2 22.731,36.003 34.177,36.003 37.415,32.765 47.007,32.765 48.323,31.45 U1.22
  Bottom Layer w0.254: A3.11 21.279,30.47 J5.2
WIFI_SPI_NATTN: A3.19 J5.1 U1.23 | length 48.2
  Top Layer w0.254: v1(19.687,32.506) 21.775,32.506 J5.1 24.89,35.622 34.019,35.622 37.257,32.384 46.849,32.384 47.823,31.411 U1.23
  Bottom Layer w0.254: A3.19 7.35,32.541 19.652,32.541 v1(19.687,32.506)
WIFI_SPI_SSEL: A3.17 J5.4 U1.20 | length 46.7
  Top Layer w0.254: A3.17 9.061,30.278 11.623,32.841 14.49,32.841 J5.4 18.413,36.765 34.493,36.765 37.73,33.527 47.323,33.527 49.323,31.527 U1.20
WIFI_UART_RX: A3.2 J1.1 R5.1 | length 37.9
  Top Layer w0.381: A3.2 5.228,8.252 7.693,10.717 19.457,10.717 23.479,14.739 J1.1 33.42,14.813 36.595,14.813 R5.1@39.199,17.417
WIFI_UART_TX: A3.3 J1.2 R6.1 | length 34.4
  Top Layer w0.381: A3.3 8.851,10.041 19.849,10.041 23.749,13.941 v1(23.793,13.898) ; J1.2 33.484,17.417 R6.1@37.675,17.417
  Bottom Layer w0.381: v1(23.793,13.898) 27.174,17.279 J1.2
pads on no net: A3.6 A3.7 A3.8 A3.12 A3.14 A3.15 A3.16 A3.20 SW2.1 SW2.4 U1.5 U1.6 U1.7 U1.10 U1.13 U1.14 U1.15 U1.16 U1.17 U1.18 U1.29 U1.30 U1.31 U1.33 U1.36 U1.43 U1.44 U1.47 U1.48 U1.53 U1.62 U1.63 U1.64 X1.0 X1.2 X1.4 X2.1 X2.8 X3.4 X3.5 X3.8

## Polygon pours and split planes (outlines as drawn)
GND on Bottom Layer "GROUND_PLANE" (solid, remove dead copper, pour order 4): 74.565,0.508 74.565,37.379 2.025,37.379 2.025,0.508

## Other copper
Top Layer:
  text ".Layer_Name" at -36.417,24.943 h1.02
Bottom Layer:
  text ".Layer_Name" at -36.109,21.5 h1.02

## Silkscreen, mask and mechanical layers (free items; w line width, h text height)
Top Overlay:
  region: 35.572,37.198 35.253,36.812 34.849,35.699 36.342,35.688 33.697,32.257 33.694,31.821 34.158,31.729 34.35,32.221 34.676,32.214 34.874,31.743 35.346,31.839 35.331,32.328 35.629,32.466 36.008,32.119 36.381,32.356 36.161,32.813 36.402,33.062 36.898,32.898 37.146,33.274 36.767,33.614 36.845,33.926 37.402,33.987 37.419,34.437 36.948,34.564 36.902,34.922 37.384,35.16 37.263,35.553 36.717,35.539 36.551,35.816 36.877,36.248 36.59,36.578 36.122,36.305 35.842,36.507 35.966,37.014
  region: 33.63,37.223 33.235,37.054 33.336,36.531 33.068,36.361 32.609,36.621 32.311,36.299 32.626,35.885 32.431,35.585 31.909,35.635 31.773,35.25 32.218,34.987 32.196,34.644 31.687,34.521 31.718,34.088 32.242,34.016 32.322,33.727 31.953,33.351 32.162,32.96 32.668,33.134 32.896,32.88 32.66,32.428 32.994,32.161 33.393,32.492 33.637,32.42 34.416,34.453 33.2,34.453 34.005,36.729
  lines w0.127: 9.63,1.455 10.893,2.944 ; 29.832,16.239 31.048,16.239 ; 30.199,13.383 29.99,13.592 ; 30.203,13.797 29.999,13.592 29.99,13.592 ; 30.835,16.034 31.04,16.239 31.048,16.239 ; 30.839,16.448 31.048,16.239 ; 31.206,13.592 29.99,13.592
  text "CLK" at 12.154,36.232 h1.02
  text "SDO" at 17.6,36.214 h1.02
  text "ATTN" at 23.206,36.179 h1.02
  text "SD" at 39.524,35.004 h1.02
  text "SD card" at 56.808,34.53 h1.02
  text "Xbee" at 7.925,34.329 h1.02
  text "SDO" at 44.755,32.792 h1.02
  text "CS" at 49.202,32.024 h1.02 r90
  text "SDI" at 20.171,31.92 h1.02
  text "CS" at 15.39,31.917 h1.02
  text "SDI" at 43.988,31.387 h1.02 r90
  text "CLK" at 51.528,31.059 h1.02 r90
  text ".Layer_Name" at -36.355,28.879 h1.02
  text "CAN" at 58.375,21.525 h1
  text "L" at 62.325,19.475 h1
  text "H" at 65,19.475 h1
  text "3.3V" at 40.345,18.355 h0.64
  text "Rx" at 29.722,16.804 h1.02
  text "Tx" at 47.325,15.225 h0.76
  text "Xbee" at 35.928,14.173 h1.02 r90
  text "Tx" at 29.696,14.093 h1.02
  text "H" at 56.725,13.925 h0.76
  text "CAN" at 47.05,13.1 h0.76 r90
  text "L" at 56.7,12.675 h0.76
  text "Rx" at 47.15,11.65 h0.76
  text "CAN term" at 65.767,9.035 h1.02 r90
  text "ON" at 61.345,8.396 h1.02
  text "Pwr" at 41.175,5.075 h1.02 r90
  text "5Vout ON" at 58.175,1.6 h1.02
  text "MCU rst" at 21.019,1.194 h1.02
  text "Xbee rst" at 11.066,1.146 h1.02
Bottom Overlay:
  drawing of 49 lines, arcs and shapes, not listed
  text "L" at 68.375,26.625 h0.76
  text "GND" at 74.25,25.4 h0.76
  text "H" at 68.3,24.55 h0.76
  text "GND" at 68.7,22.625 h0.76
  text "GND" at 68.675,20.525 h0.76
  text "DAQ module v2.0" at 24.675,20.1 h1.5
  text ".Layer_Name" at -36.232,17.503 h1.02
  text "5Vout" at 68.525,16.5 h0.76
  text "5Vout" at 74.625,13.6 h0.76
  text "24V" at 68.525,12.525 h0.76
  text "5V" at 48.882,9.164 h1.02
  text "24V" at 54.605,9.153 h1.02
  text "3.3V" at 41.446,0.337 h1.02
  text "5V" at 45.702,0.314 h1.02
Top Paste:
  text ".Layer_Name" at -36.281,30.754 h1.02
Bottom Paste:
  text ".Layer_Name" at -36.232,15.412 h1.02
Top Solder:
  text ".Layer_Name" at -36.355,26.911 h1.02
Bottom Solder:
  text ".Layer_Name" at -36.171,19.593 h1.02
Dimensions:
  lines w0.203: 0,0 75.073,0 75.073,37.988 0,37.988 0,0
  text ".Layer_Name" at -36.275,13.475 h1.02

## Dimensions
75.025,38 to 0,0 on Dimensions
75.025,38 to 0,0 on Dimensions
3.2,3.2 to 0,0 on Dimensions
3.2,3.2 to 0,0 on Dimensions
3.2,3.2 to 71,3.2 on Dimensions
3.2,3.2 to 3.2,35 on Dimensions

## Text inside footprints (layer, text, board x,y; h text height)
J7: Top Overlay "GND" at 29.691,10.642 h0.76; Top Overlay "3.3V" at 37.747,3.142 h0.76; Top Overlay "TCK" at 29.779,5.394 h0.76; Top Overlay "TDI" at 37.82,5.554 h0.76; Top Overlay "TDO" at 37.66,7.996 h0.76; Top Overlay "TMS" at 29.706,7.952 h0.76; Top Overlay "RST" at 37.718,10.525 h0.76; Top Overlay "5V" at 30.291,3.04 h0.76